# EAGLE board scheme1 (EAGLE 6.5.0)
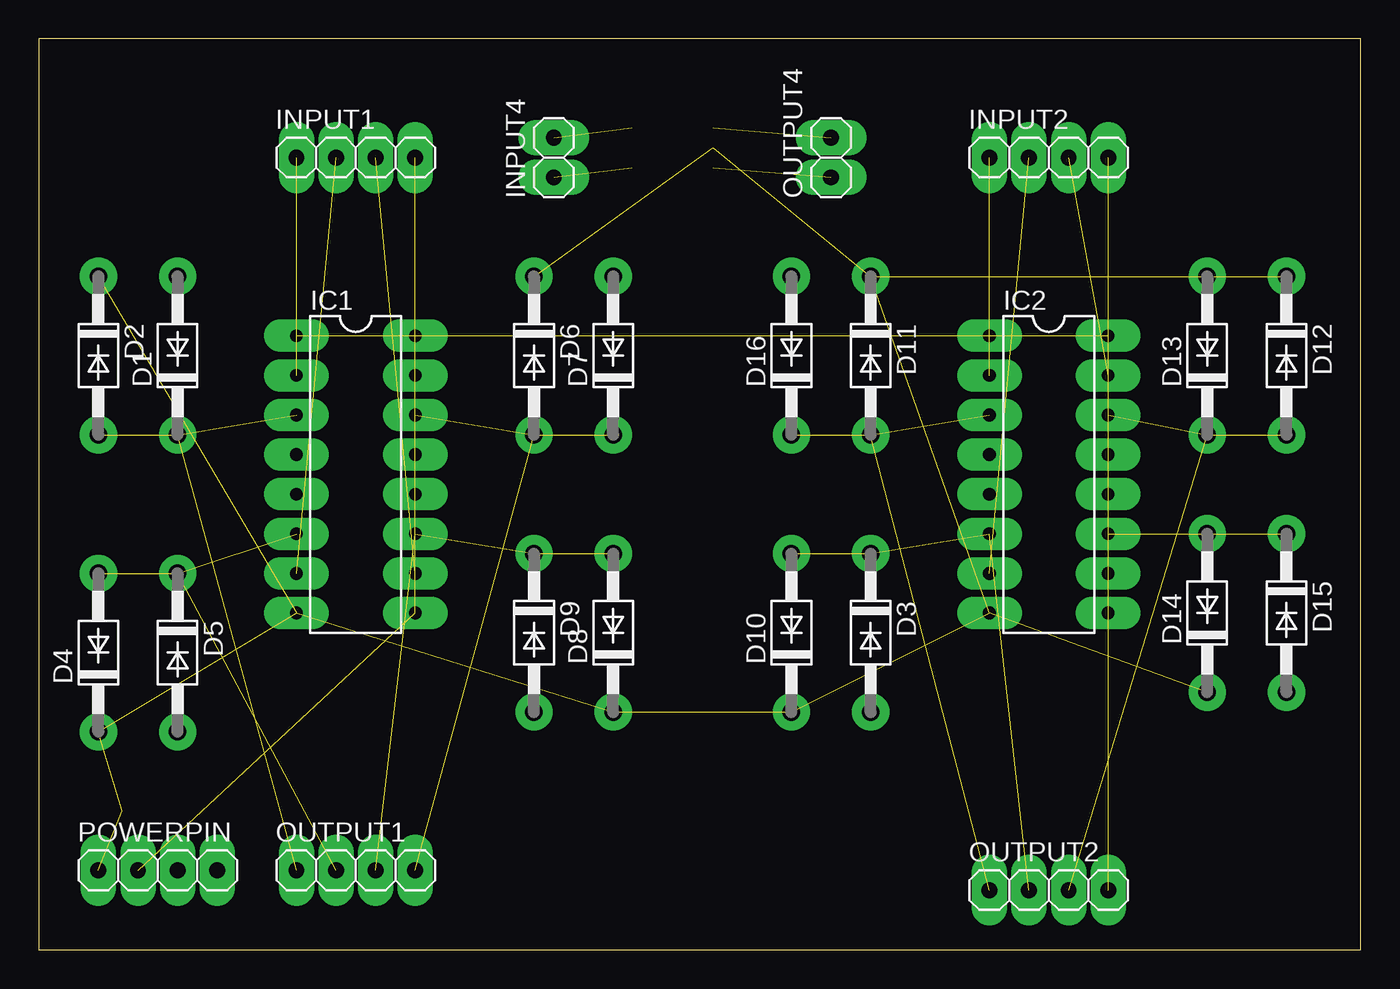
[diagram p0: board, top side]
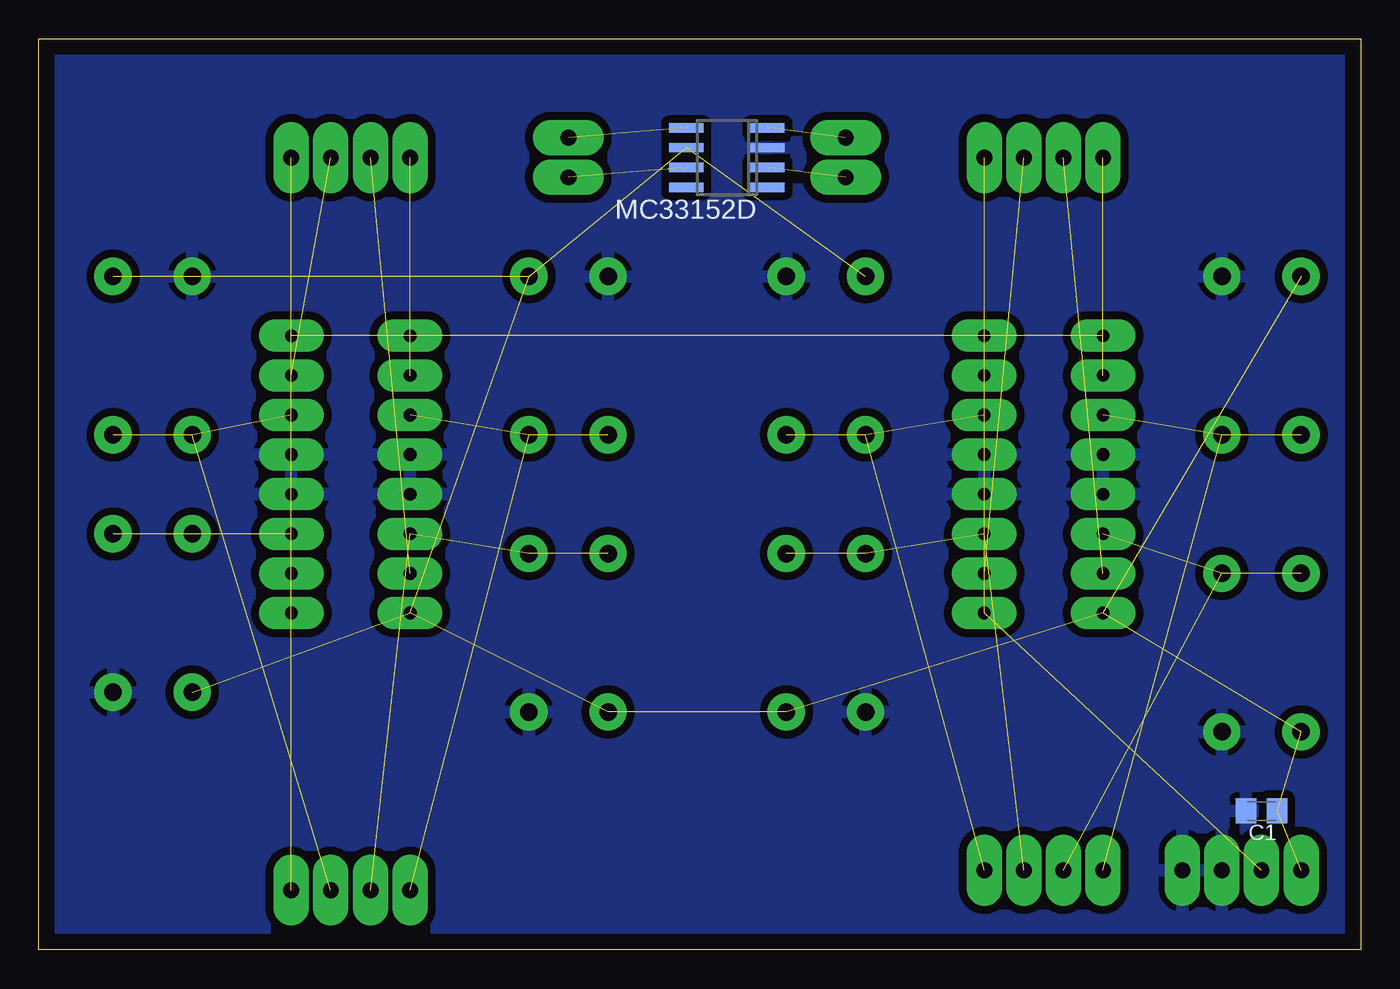
[diagram p1: board, bottom side, seen from below]

Size 84.76 x 58.41 mm. Coordinates in mm from the lower left corner, seen from the top.
Outline: 0,0 84.76,0 84.76,58.41 0,58.41 0,0
Copper layers (1*16): Top 0.035mm / dielectric 1.5mm / Bottom 0.035mm
Design rules "default": minimum track width 10mil, minimum drill 32mil, track to track 12mil, track to pad 12mil, pad to pad 12mil, via to via 12mil, smd to smd 8mil, copper to edge 40mil, drill to drill 40mil, minimum pad ring 25mil, minimum via ring 12mil, stop-mask expansion 4mil, vias tented up to drill 0mil, thermal gap 15mil

## Footprints (pad centres in the part's own frame; a part is rotated, then mirrored left to right if it is on the bottom)
C0805K = smd 1.3 x 1.6: 1 -1,0; 2 1,0
DO41-10 = drill 1.118: A 5.08,0; C -5.08,0
DIL16 = drill 0.813 long: 1 -8.89,-3.81; 2 -6.35,-3.81; 3 -3.81,-3.81; 4 -1.27,-3.81; 5 1.27,-3.81; 6 3.81,-3.81; 7 6.35,-3.81; 8 8.89,-3.81; 9 8.89,3.81; 10 6.35,3.81; 11 3.81,3.81; 12 1.27,3.81; 13 -1.27,3.81; 14 -3.81,3.81; 15 -6.35,3.81; 16 -8.89,3.81
1X04 = drill 1.016 long: 1 -3.81,0; 2 -1.27,0; 3 1.27,0; 4 3.81,0
1X02 = drill 1.016 long: 1 -1.27,0; 2 1.27,0
SOIC8 = smd 0.6 x 2.2: 1 -1.905,-2.6; 2 -0.635,-2.6; 3 0.635,-2.6; 4 1.905,-2.6; 5 1.905,2.6; 6 0.635,2.6; 7 -0.635,2.6; 8 -1.905,2.6

## Placement (x,y rotation side)
C1  0.22 uF  [C0805K]  6.35,8.89 180 bottom
D1  1N4933  [DO41-10]  8.89,38.1 90 top
D2  1N4933  [DO41-10]  3.81,38.1 270 top
D3  1N4933  [DO41-10]  53.34,20.32 270 top
D4  1N4933  [DO41-10]  3.81,19.05 90 top
D5  1N4933  [DO41-10]  8.89,19.05 270 top
D6  1N4933  [DO41-10]  31.75,38.1 270 top
D7  1N4933  [DO41-10]  36.83,38.1 90 top
D8  1N4933  [DO41-10]  36.83,20.32 90 top
D9  1N4933  [DO41-10]  31.75,20.32 270 top
D10  1N4933  [DO41-10]  48.26,20.32 90 top
D11  1N4933  [DO41-10]  53.34,38.1 270 top
D12  1N4933  [DO41-10]  80.01,38.1 270 top
D13  1N4933  [DO41-10]  74.93,38.1 90 top
D14  1N4933  [DO41-10]  74.93,21.59 90 top
D15  1N4933  [DO41-10]  80.01,21.59 270 top
D16  1N4933  [DO41-10]  48.26,38.1 90 top
IC1  L293E  [DIL16]  20.32,30.48 270 top
IC2  L293E  [DIL16]  64.77,30.48 270 top
INPUT1  [1X04]  20.32,50.8 0 top
INPUT2  [1X04]  64.77,50.8 0 top
INPUT4  [1X02]  33.02,50.8 90 top
MC33152D  MC33152D  [SOIC8]  40.64,50.8 90 bottom
OUTPUT1  [1X04]  20.32,5.08 0 top
OUTPUT2  [1X04]  64.77,3.81 0 top
OUTPUT4  [1X02]  50.8,50.8 90 top
POWERPIN  [1X04]  7.62,5.08 0 top

## Library data of the parts
C1 = resistor
D1-D16 = diode
IC1 IC2 = texas; MF: Arrow Electronics; MPN: L293E; OC_FARNELL: 1467711; OC_NEWARK: 89K0732
INPUT1 INPUT2 INPUT4 OUTPUT1 OUTPUT2 OUTPUT4 POWERPIN = pinhead
MC33152D = mylib

## Nets
+5V: IC1.1 IC1.9 IC1.16 IC2.1 IC2.9 IC2.16 POWERPIN.2
+12V: C1.1 D2.C D4.C D6.C D8.C D10.C D11.C D12.C D14.C IC1.8 IC2.8 MC33152D.6 POWERPIN.1
GND: C1.2 D1.A D3.A D5.A D7.A D9.A D13.A D15.A D16.A IC1.4 IC1.5 IC1.12 IC1.13 IC2.4 IC2.5 IC2.12 IC2.13 MC33152D.3 POWERPIN.3 POWERPIN.4
IN1: IC1.2 INPUT1.1
IN2: IC1.7 INPUT1.2
IN3: IC1.10 INPUT1.3
IN4: IC1.15 INPUT1.4
IN5: IC2.2 INPUT2.1
IN6: IC2.7 INPUT2.2
IN7: IC2.15 INPUT2.3
IN8: IC2.10 INPUT2.4
IN9: INPUT4.1 MC33152D.2
IN10: INPUT4.2 MC33152D.4
OUT1: D1.C D2.A IC1.3 OUTPUT1.1
OUT2: D4.A D5.C IC1.6 OUTPUT1.2
OUT3: D8.A D9.C IC1.11 OUTPUT1.3
OUT4: D6.A D7.C IC1.14 OUTPUT1.4
OUT5: D11.A D16.C IC2.3 OUTPUT2.1
OUT6: D3.C D10.A IC2.6 OUTPUT2.2
OUT7: D12.A D13.C IC2.14 OUTPUT2.3
OUT8: D14.A D15.C IC2.11 OUTPUT2.4
OUT9: MC33152D.7 OUTPUT4.1
OUT10: MC33152D.5 OUTPUT4.2

## Tracks (layer width: path | path; a pad name or v marks a point on that pad's centre or on a via)
+5V  (6 unrouted)
+12V  (12 unrouted)
GND
  pour Bottom (isolate 0.508): -1.27,60.96 86.36,60.96 86.36,-3.81 -1.27,-3.81
IN1  (1 unrouted)
IN2  (1 unrouted)
IN3  (1 unrouted)
IN4  (1 unrouted)
IN5  (1 unrouted)
IN6  (1 unrouted)
IN7  (1 unrouted)
IN8  (1 unrouted)
IN9  (1 unrouted)
IN10  (1 unrouted)
OUT1  (3 unrouted)
OUT2  (3 unrouted)
OUT3  (3 unrouted)
OUT4  (3 unrouted)
OUT5  (3 unrouted)
OUT6  (3 unrouted)
OUT7  (3 unrouted)
OUT8  (3 unrouted)
OUT9  (1 unrouted)
OUT10  (1 unrouted)